# EAGLE board masterClock_01 (EAGLE 9.0.0)
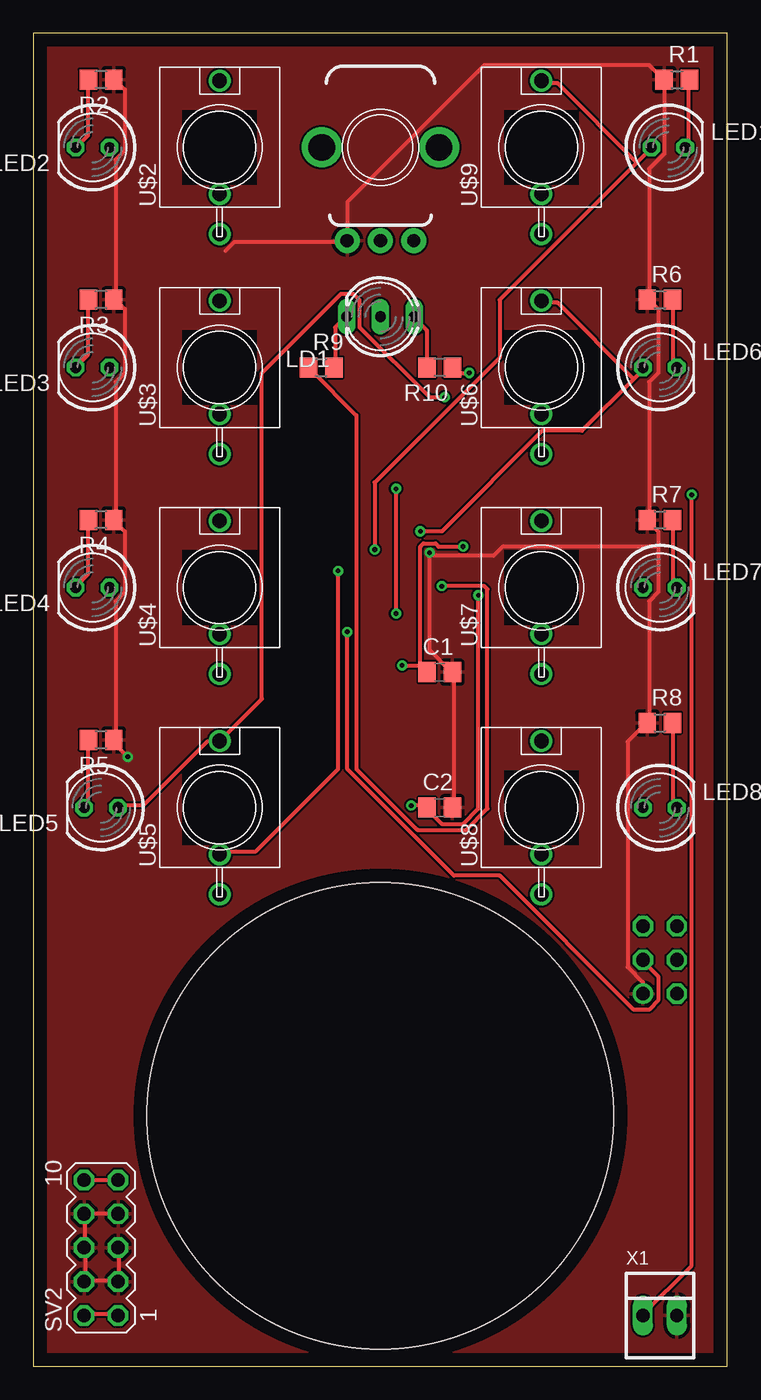
[diagram p0: board, top side]
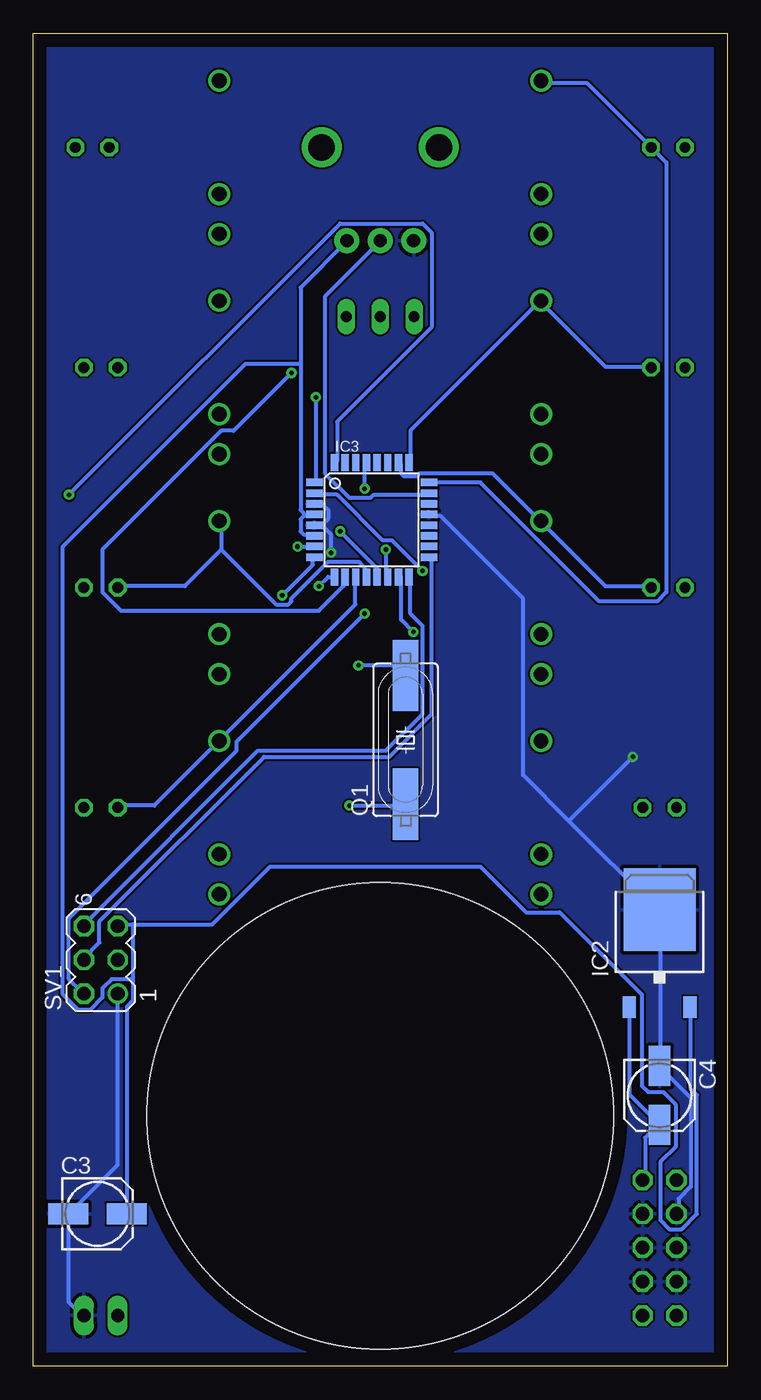
[diagram p1: board, bottom side, seen from below]

Size 52.05 x 100 mm. Coordinates in mm from the lower left corner, seen from the top.
Outline: 0,0 52.05,0 52.05,100 0,100 0,0
Copper layers (1*16): Top 0.035mm / dielectric 1.5mm / Bottom 0.035mm
Design rules "default *": minimum track width 12mil, minimum drill 0.35mm, track to track 6mil, track to pad 6mil, pad to pad 6mil, via to via 6mil, smd to smd 6mil, copper to edge 40mil, drill to drill 6mil, minimum pad ring 10mil, minimum via ring 8mil, stop-mask expansion 4mil, vias tented up to drill 0mil, thermal gap 10mil
Holes 35 mm at 26.04,18.8

## Footprints (pad centres in the part's own frame; a part is rotated, then mirrored left to right if it is on the bottom)
C0805 = smd 1.3 x 1.5: 1 -0.95,0; 2 0.95,0
153CLV-0505 = smd 3 x 1.6: + 2.2,0; - -2.2,0
TO252 = smd 1 x 1.6: 1 -2.28,-4.8; 2 2.28,-4.8 | smd 5.4 x 6.2: 3 0,2.5
TQFP32-08 = smd 1.27 x 0.559: 1 -4.293,2.8; 2 -4.293,2; 3 -4.293,1.2; 4 -4.293,0.4; 5 -4.293,-0.4; 6 -4.293,-1.2; 7 -4.293,-2; 8 -4.293,-2.8; 17 4.293,-2.8; 18 4.293,-2; 19 4.293,-1.2; 20 4.293,-0.4; 21 4.293,0.4; 22 4.293,1.2; 23 4.293,2; 24 4.293,2.8 | smd 0.559 x 1.27: 9 -2.8,-4.293; 10 -2,-4.293; 11 -1.2,-4.293; 12 -0.4,-4.293; 13 0.4,-4.293; 14 1.2,-4.293; 15 2,-4.293; 16 2.8,-4.293; 25 2.8,4.293; 26 2,4.293; 27 1.2,4.293; 28 0.4,4.293; 29 -0.4,4.293; 30 -1.2,4.293; 31 -2,4.293; 32 -2.8,4.293
DUOLED-A-5MM = drill 0.813 long: A 0,0; CR 2.54,0; CX -2.54,0
LED5MM = drill 0.813 octagon: A -1.27,0; K 1.27,0
HC49UP = smd 5.334 x 1.93: 1 -4.826,0; 2 4.826,0
R0805 = smd 1.3 x 1.5: 1 -0.95,0; 2 0.95,0
MA03-2 = drill 1.016: 1 -2.54,-1.27 | drill 1.016 octagon: 2 -2.54,1.27; 3 0,-1.27; 4 0,1.27; 5 2.54,-1.27; 6 2.54,1.27
MA05-2 = drill 1.016 octagon: 1 -5.08,-1.27; 2 -5.08,1.27; 3 -2.54,-1.27; 4 -2.54,1.27; 5 0,-1.27; 6 0,1.27; 7 2.54,-1.27; 8 2.54,1.27; 9 5.08,-1.27; 10 5.08,1.27
INSTRUO_Q-POT = drill 1 pad 1.88: P$1 -2.5,-7; P$2 0,-7; P$3 2.5,-7 | drill 2 pad 2.68: P$4 -4.4,0; P$5 4.4,0
WQP-PJ301M-12_JACK = drill 1.1: P$1 0,5; P$2 0,-3.5; P$3 0,-6.5
22-23-2021 = drill 1 long: 1 -1.27,0; 2 1.27,0

## Placement (x,y rotation side)
C1  [C0805]  30.48,52.07 0 top
C2  [C0805]  30.48,41.91 0 top
C3  [153CLV-0505]  47.24,11.43 0 bottom
C4  [153CLV-0505]  5.08,20.32 270 bottom
IC2  7805DT  [TO252]  5.08,31.75 0 bottom
IC3  MEGA8-AI  [TQFP32-08]  26.67,63.5 0 bottom
LD1  [DUOLED-A-5MM]  26.04,78.74 180 top
LED1  [LED5MM]  47.62,91.44 0 top
LED2  [LED5MM]  4.45,91.44 180 top
LED3  [LED5MM]  4.45,74.93 180 top
LED4  [LED5MM]  4.45,58.42 180 top
LED5  [LED5MM]  5.08,41.91 180 top
LED6  [LED5MM]  46.99,74.93 0 top
LED7  [LED5MM]  46.99,58.42 0 top
LED8  [LED5MM]  46.99,41.91 0 top
Q1  [HC49UP]  24.13,46.99 90 bottom
R1  [R0805]  48.26,96.52 0 top
R2  [R0805]  5.08,96.52 180 top
R3  [R0805]  5.08,80.01 180 top
R4  [R0805]  5.08,63.5 180 top
R5  [R0805]  5.08,46.99 180 top
R6  [R0805]  46.99,80.01 0 top
R7  [R0805]  46.99,63.5 0 top
R8  [R0805]  46.99,48.26 0 top
R9  [R0805]  21.59,74.93 0 top
R10  [R0805]  30.48,74.93 180 top
SV1  [MA03-2]  46.99,30.48 90 bottom
SV2  [MA05-2]  5.08,8.89 90 top
U$1  INSTRUO_Q-POT  [INSTRUO_Q-POT]  26.04,91.44 0 top
U$2  WQP-PJ301M-12_JACK  [WQP-PJ301M-12_JACK]  13.97,91.44 0 top
U$3  WQP-PJ301M-12_JACK  [WQP-PJ301M-12_JACK]  13.97,74.93 0 top
U$4  WQP-PJ301M-12_JACK  [WQP-PJ301M-12_JACK]  13.97,58.42 0 top
U$5  WQP-PJ301M-12_JACK  [WQP-PJ301M-12_JACK]  13.97,41.91 0 top
U$6  WQP-PJ301M-12_JACK  [WQP-PJ301M-12_JACK]  38.1,74.93 0 top
U$7  WQP-PJ301M-12_JACK  [WQP-PJ301M-12_JACK]  38.1,58.42 0 top
U$8  WQP-PJ301M-12_JACK  [WQP-PJ301M-12_JACK]  38.1,41.91 0 top
U$9  WQP-PJ301M-12_JACK  [WQP-PJ301M-12_JACK]  38.1,91.44 0 top
X1  22-23-2021  [22-23-2021]  46.99,3.81 0 top

## Library data of the parts
C1-C4 = rcl; SPICEPREFIX: C
IC2 = linear
IC3 = atmel; MPN: ATMEGA8-16AU; OC_FARNELL: 9171371; OC_NEWARK: 73M8863
LD1 LED1-LED8 = led
Q1 = crystal; OC_FARNELL: unknown; OC_NEWARK: unknown
R1-R10 = eagle-ltspice; SPICEMODEL: NONE; SPICEPREFIX: R
SV1 SV2 = con-lstb; OC_FARNELL: unknown; OC_NEWARK: unknown
U$1 = Pure_VCO_SMD_V2_2
U$2-U$9 = thonkiconn
X1 = con-molex; MF: MOLEX; MPN: 22-23-2021; OC_FARNELL: 1462926; OC_NEWARK: 25C3832

## Nets
*2: IC3.26 LED4.A U$4.P$1
*3: IC3.25 LED3.A U$3.P$1
*4: IC3.24 LED2.A U$2.P$1
+5V: C3.+ IC2.2 IC3.4 IC3.6 SV1.5 U$1.P$3
/1: IC3.11 LED8.A U$8.P$1
/2: IC3.12 LED7.A U$7.P$1
/3: IC3.13 LED6.A U$6.P$1
/4: IC3.14 LED1.A U$9.P$1
AVCC: IC3.18
BUTT: IC3.32 X1.1
GND: C1.2 C2.2 C3.- C4.- IC2.3 IC3.3 IC3.5 IC3.21 R1.1 R2.1 R3.1 R4.1 R5.1 R6.1 R7.1 R8.1 SV1.1 SV2.3 SV2.4 SV2.5 SV2.6 SV2.7 SV2.8 U$1.P$1 X1.2
IN: IC3.1 LED5.A U$5.P$1
LED_B: IC3.10 R10.1
LED_R: IC3.9 R9.1
MISO: IC3.16 SV1.6
MOSI: IC3.15 SV1.3
N$1: LED1.K R1.2
N$2: LED2.K R2.2
N$3: LED3.K R3.2
N$4: LED4.K R4.2
N$5: LED5.K R5.2
N$6: LED6.K R6.2
N$7: LED7.K R7.2
N$8: LED8.K R8.2
N$9: LD1.CR R9.2
N$10: LD1.CX R10.2
N$11: C1.1 IC3.7 Q1.2
N$12: C2.1 IC3.8 Q1.1
OUT: IC3.2 U$5.P$2
POT: IC3.23 U$1.P$2
RESET: IC3.29 SV1.2
SCK: IC3.17 SV1.4
V+: C4.+ IC2.1 SV2.9 SV2.10
V-: SV2.1 SV2.2

## Tracks (layer width: path | path; a pad name or v marks a point on that pad's centre or on a via)
*2
  Bottom 0.305: IC3.26 24.46,67.67 24.46,66.98 24.23,66.75 23.32,66.75 23.09,66.98 17.6,66.98 14.17,63.55 U$4.P$1 13.95,63.32 9.14,58.52 5.71,58.52 LED4.A
*3
  Bottom 0.305: IC3.25 23.77,67.89 23.77,70.18 14.17,79.78 U$3.P$1 13.95,79.78 9.14,74.98 5.71,74.98 LED3.A
*4
  Bottom 0.305: IC3.24 22.17,66.29 18.52,66.29 9.6,57.38 5.26,57.38 4.57,58.06 4.57,90.3 LED2.A 10.52,96.24 13.95,96.24 U$2.P$1
+5V
  Bottom 0.305: 31.77,63.78 32,63.55 32,62.64 31.77,62.41 31.09,62.41 IC3.6 | 31.77,63.78 31.09,63.78 IC3.4 | 31.77,63.78 31.77,64.01 32,64.24 32,75.21 | 32,75.21 32,80.92 28.57,84.35 U$1.P$3 | 44.58,33.15 45.72,33.15 SV1.5 | 44.58,33.15 38.63,33.15 34.29,37.49 18.52,37.49 15.09,34.06 12.57,34.06 6.4,27.89 6.4,21.03 5.94,20.57 4.8,20.57 3.89,19.66 3.89,16.46 5.03,15.32 5.03,10.97 4.34,10.29 3.43,10.29 2.29,11.43 2.29,20.34 2.74,20.8 2.74,26.75 IC2.2 | 44.58,33.15 44.58,29.03 | 44.58,29.03 44.58,27.43 45.03,26.98 C3.+ | 32,75.21 36.12,75.21 49.84,61.49 49.84,27.89 48.69,26.75 47.78,26.75 46.86,27.66 46.86,28.35 46.18,29.03 44.58,29.03
/1
  Bottom 0.305: IC3.11 27.89,59.21 27.89,57.15 37.95,47.09 U$8.P$1 38.18,46.86 42.98,42.06 45.72,42.06 LED8.A
/2
  Bottom 0.305: 37.95,61.27 33.83,57.15 32.92,57.15 32.69,57.38 32.69,57.61 29.95,60.35 27.66,60.35 27.2,59.89 27.2,59.21 IC3.12 | 37.95,61.27 37.95,63.32 U$7.P$1 | 37.95,61.27 40.69,58.52 45.72,58.52 LED7.A
/3  (via drill 0.35)
  Top 0.305: v29.03,62.64 30.63,62.64 38.18,70.18 41.15,70.18 45.03,74.07 | 45.03,74.07 45.72,74.75 LED6.A | 45.03,74.07 39.32,79.78 38.18,79.78 U$6.P$1
  Bottom 0.305: v29.03,62.64 26.29,59.89 26.29,59.21 IC3.13
/4  (via drill 0.35)
  Top 0.305: v25.6,61.27 25.6,66.29 34.98,75.67 34.98,80.01 45.26,90.3 | 45.26,90.3 46.41,91.44 LED1.A | 45.26,90.3 39.32,96.24 38.18,96.24 U$9.P$1
  Bottom 0.305: v25.6,61.27 25.6,59.21 IC3.14
BUTT  (via drill 0.35)
  Top 0.305: v49.38,65.38 49.38,7.54 45.72,3.89 X1.1
  Bottom 0.305: v49.38,65.38 29.03,85.72 22.86,85.72 22.17,85.04 22.17,77.95 29.26,70.87 29.26,67.89 IC3.32
GND  (via drill 0.35)
  Top 0.305: SV2.7 3.89,11.43 | 3.89,6.4 3.89,8.69 SV2.6 3.89,8.91 3.89,11.43 | SV2.5 6.4,8.69 6.4,6.4 SV2.3 6.17,6.4 3.89,6.4 | 3.89,6.4 SV2.4 | 3.89,11.43 SV2.8 | 6.17,80.01 6.17,90.53 6.86,91.21 6.86,95.78 6.17,96.47 R2.1 | 14.4,83.67 15.09,84.35 23.32,84.35 U$1.P$1 23.55,84.58 23.55,87.33 33.83,97.61 46.18,97.61 47.09,96.7 R1.1 47.32,96.47 47.32,90.98 46.18,89.84 46.18,80.01 | 6.17,80.01 6.86,79.32 6.86,74.52 6.17,73.84 6.17,63.55 R4.1 6.17,63.32 6.86,62.64 6.86,58.06 6.17,57.38 6.17,47.09 R5.1 5.94,46.86 v7.09,45.72 | 6.17,80.01 R3.1 | C2.2 31.55,42.06 31.55,51.89 C1.2 31.32,52.12 29.72,53.72 29.72,60.81 | 46.86,61.49 46.86,62.64 46.18,63.32 R7.1 46.18,63.55 46.18,73.84 46.86,74.52 46.86,79.32 46.18,80.01 | 46.86,61.49 46.86,58.06 46.18,57.38 46.18,48.46 R8.1 45.95,48.23 44.58,46.86 44.58,29.95 45.72,28.8 SV1.1 | 46.18,80.01 R6.1 | 29.72,60.81 34.52,60.81 35.2,61.49 46.86,61.49 | 29.72,60.81 v29.72,61.04
  Bottom 0.305: 11.89,40.92 5.26,34.29 IC2.3 5.03,34.06 5.03,22.63 C4.- 5.03,22.4 2.74,20.12 2.74,13.49 3.66,12.57 3.66,11.43 SV2.8 | 11.89,40.92 15.32,44.35 15.32,57.61 21.49,63.78 22.17,63.78 IC3.21 | 49.38,11.43 49.38,4.8 48.46,3.89 X1.2 | SV1.1 45.72,15.09 49.38,11.43 | 49.38,11.43 C3.- | 30.4,63.09 30.86,63.09 IC3.5 30.4,63.09 | 30.4,63.09 29.95,63.55 29.95,64.24 30.4,64.69 30.86,64.69 IC3.3 | 30.4,63.09 29.72,62.41 v29.72,61.04 | v7.09,45.72 11.89,40.92
  pour Top: 0,100 52,100 52,0 0,0
  pour Bottom: 0,100 52,100 52,0 0,0
IN  (via drill 0.35)
  Top 0.305: v30.86,72.69 29.72,72.69 24.46,77.95 24.46,80.01 24,80.47 23.09,80.47 17.14,74.52 17.14,50.06 14.17,47.09 U$5.P$1 13.95,46.86 13.03,46.86 8.23,42.06 6.4,42.06 LED5.A
  Bottom 0.305: v30.86,72.69 30.86,66.52 IC3.1
LED_B  (via drill 0.35)
  Top 0.305: v32.69,74.52 31.77,74.52 31.55,74.75 R10.1
  Bottom 0.305: v32.69,74.52 37.03,70.18 37.95,70.18 46.86,61.27 46.86,58.06 45.49,56.69 30.63,56.69 28.8,58.52 28.8,59.21 IC3.10
LED_R  (via drill 0.35)
  Top 0.305: v30.63,58.52 33.83,58.52 34.06,58.29 34.06,41.83 32.46,40.23 28.8,40.23 24.23,44.81 24.23,71.32 20.8,74.75 R9.1
  Bottom 0.305: IC3.9 29.95,59.21 v30.63,58.52
MISO
  Bottom 0.305: IC3.16 23.77,59.21 23.77,56.46 22.86,55.55 22.86,48.92 25.6,46.18 35.2,46.18 48.23,33.15 SV1.6
MOSI  (via drill 0.35)
  Top 0.305: v23.55,55.09 23.55,44.81 31.55,36.8 34.98,36.8 45.03,26.75 46.18,26.75 46.86,27.43 46.86,29.26 45.72,30.4 SV1.3
  Bottom 0.305: v23.55,55.09 24.46,56.01 24.46,59.21 IC3.15
N$1
  Top 0.305: R1.2 49.15,96.47 49.15,91.67 48.92,91.44 LED1.K
N$2
  Top 0.305: R2.2 4.12,96.47 4.12,92.35 3.2,91.44 LED2.K
N$3
  Top 0.305: R3.2 4.12,80.01 4.12,75.89 3.2,74.98 LED3.K
N$4
  Top 0.305: R4.2 4.12,63.32 4.12,59.44 3.2,58.52 LED4.K
N$5
  Top 0.305: R5.2 4.12,46.86 4.12,42.29 3.89,42.06 LED5.K
N$6
  Top 0.305: R6.2 48.01,80.01 48.01,75.21 48.23,74.98 LED6.K
N$7
  Top 0.305: R7.2 48.01,63.32 48.01,58.75 48.23,58.52 LED7.K
N$8
  Top 0.305: R8.2 48.01,48.23 48.01,42.29 48.23,42.06 LED8.K
N$9
  Top 0.305: R9.2 22.63,74.98 22.63,77.95 23.32,78.64 LD1.CR
N$10
  Top 0.305: R10.2 29.49,74.98 29.49,77.72 28.57,78.64 LD1.CX
N$11  (via drill 0.35)
  Top 0.305: v32.23,61.49 30.4,61.49 30.18,61.72 29.26,61.72 29.03,61.49 29.03,52.58 | 29.03,52.58 29.49,52.12 C1.1 29.03,52.58 | v27.66,52.58 29.03,52.58
  Bottom 0.305: v32.23,61.49 31.09,61.49 IC3.7 | v27.66,52.58 24.92,52.58 24.23,51.89 Q1.2
N$12  (via drill 0.35)
  Top 0.305: v33.38,57.84 33.38,41.83 32.23,40.69 30.63,40.69 29.49,41.83 C2.1 29.49,42.06 v28.35,42.06
  Bottom 0.305: v33.38,57.84 31.09,60.12 31.09,60.58 IC3.8 | v28.35,42.06 24.23,42.06 Q1.1
OUT  (via drill 0.35)
  Top 0.305: v22.86,59.66 22.86,44.81 16.69,38.63 14.17,38.63 U$5.P$2
  Bottom 0.305: v22.86,59.66 25.15,61.95 25.83,61.95 29.26,65.38 30.86,65.38 IC3.2
POT
  Bottom 0.305: IC3.23 22.4,65.38 26.52,65.38 26.75,65.15 28.35,65.15 30.18,66.98 30.18,80.24 26.06,84.35 U$1.P$2
RESET  (via drill 0.35)
  Top 0.305: v27.2,56.46 v27.2,65.84
  Bottom 0.305: v27.2,65.84 27.2,67.67 IC3.29 | v27.2,56.46 36.8,46.86 36.8,46.18 49.38,33.6 49.38,29.03 48.46,28.12 SV1.2
SCK
  Bottom 0.305: IC3.17 22.17,60.58 22.17,48.92 25.38,45.72 34.75,45.72 47.09,33.38 47.09,31.77 48.23,30.63 SV1.4
V+
  Top 0.305: SV2.10 3.89,13.95 6.17,13.95 SV2.9
  Bottom 0.305: IC2.1 7.32,26.75 7.32,20.34 5.26,18.29 C4.+ 5.26,18.06 6.17,17.14 6.17,14.17 SV2.9
V-
  Top 0.305: SV2.2 3.89,3.89 6.17,3.89 SV2.1